# EAGLE board Blinker (EAGLE 6.2)
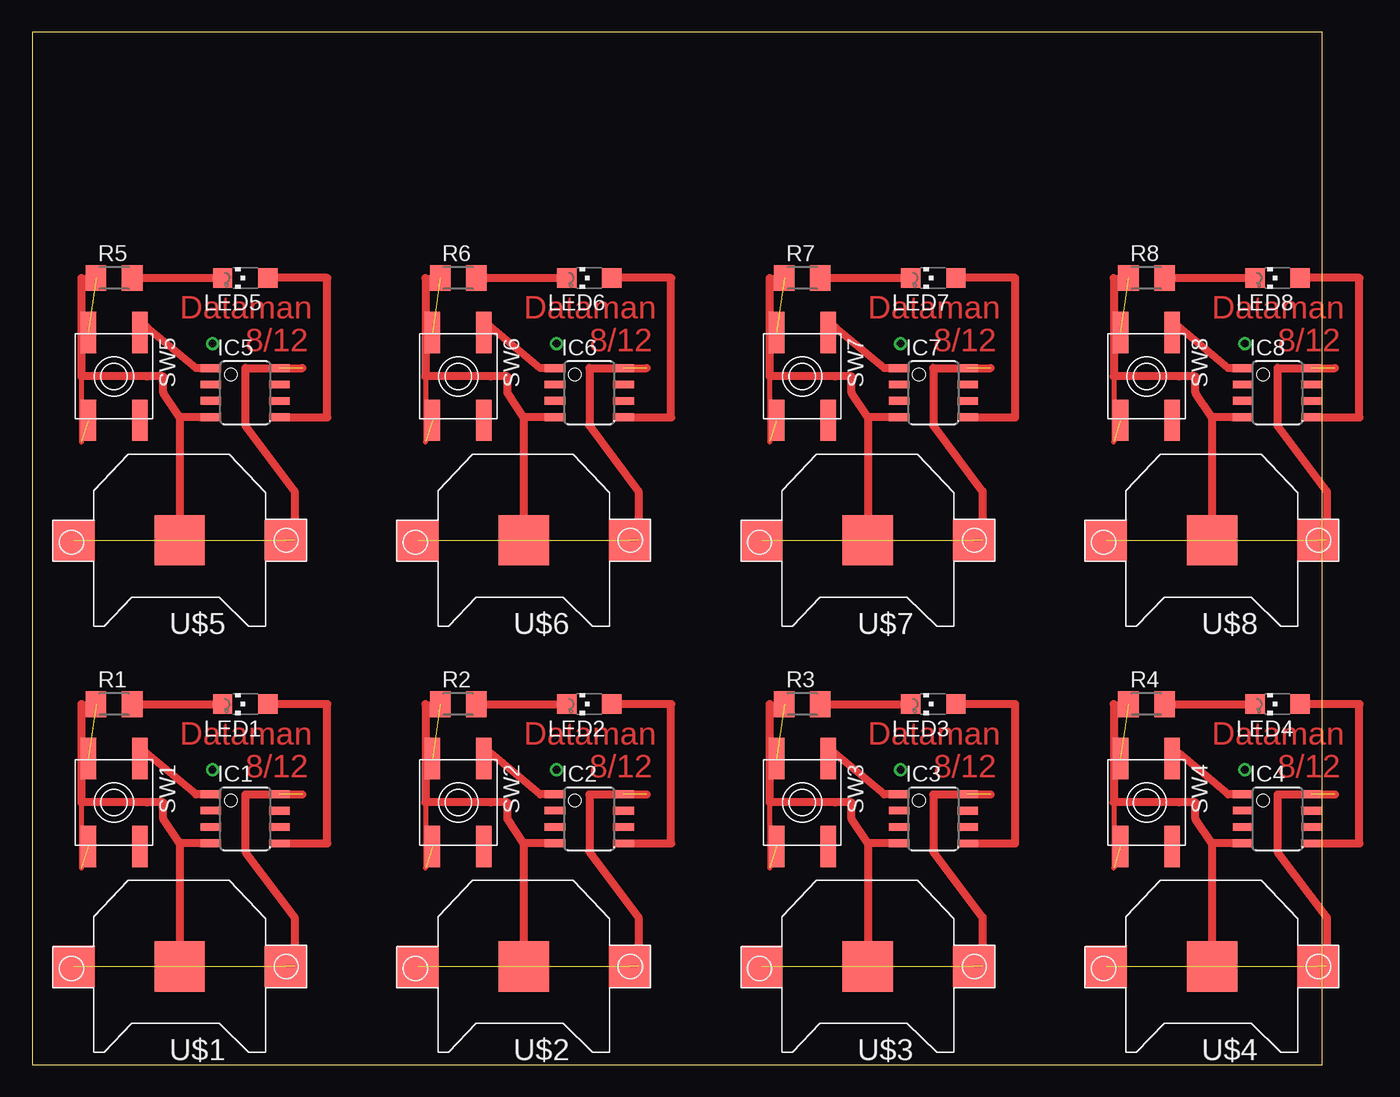
[diagram p0: board, top side]

Size 100 x 80 mm. Coordinates in mm from the lower left corner, seen from the top.
Outline: 0,0 100,0 100,80 0,80 0,0
Copper layers (1*16): Top 0.035mm / dielectric 1.5mm / Bottom 0.035mm
Design rules: minimum track width 10mil, minimum drill 24mil, track to track 8mil, track to pad 8mil, pad to pad 8mil, via to via 8mil, smd to smd 8mil, copper to edge 40mil, drill to drill 8mil, minimum pad ring 10mil, minimum via ring 8mil, stop-mask expansion 4mil, vias tented up to drill 0mil, thermal gap 10mil

## Footprints (pad centres in the part's own frame; a part is rotated, then mirrored left to right if it is on the bottom)
8S1 = smd 0.6 x 1.6: 1 -1.905,-2.654; 2 -0.645,-2.654; 3 0.625,-2.654; 4 1.895,-2.654; 5 1.905,2.654; 6 0.635,2.654; 7 -0.635,2.654; 8 -1.905,2.654
CHIPLED_1206 = smd 1.5 x 1.5: A 0,-1.75; C 0,1.75
M1206 = smd 1.6 x 2: 1 -1.4,0; 2 1.4,0
EVQ-Q2 = smd 3.2 x 1.2: A -3.4,-2; A' 3.4,-2; B -3.4,2; B' 3.4,2
CR1220-SMD = smd 3.2 x 3.2: +$1 -8.2,0; +$2 8.2,0 | smd 3.9 x 3.9: - 0,0

## Placement (x,y rotation side)
IC1  TINY13V-10SSU  [8S1]  16.51,19.05 270 top
IC2  TINY13V-10SSU  [8S1]  43.18,19.05 270 top
IC3  TINY13V-10SSU  [8S1]  69.85,19.05 270 top
IC4  TINY13V-10SSU  [8S1]  96.52,19.05 270 top
IC5  TINY13V-10SSU  [8S1]  16.51,52.07 270 top
IC6  TINY13V-10SSU  [8S1]  43.18,52.07 270 top
IC7  TINY13V-10SSU  [8S1]  69.85,52.07 270 top
IC8  TINY13V-10SSU  [8S1]  96.52,52.07 270 top
LED1  [CHIPLED_1206]  16.51,27.94 90 top
LED2  [CHIPLED_1206]  43.18,27.94 90 top
LED3  [CHIPLED_1206]  69.85,27.94 90 top
LED4  [CHIPLED_1206]  96.52,27.94 90 top
LED5  [CHIPLED_1206]  16.51,60.96 90 top
LED6  [CHIPLED_1206]  43.18,60.96 90 top
LED7  [CHIPLED_1206]  69.85,60.96 90 top
LED8  [CHIPLED_1206]  96.52,60.96 90 top
R1  [M1206]  6.35,27.94 0 top
R2  [M1206]  33.02,27.94 0 top
R3  [M1206]  59.69,27.94 0 top
R4  [M1206]  86.36,27.94 0 top
R5  [M1206]  6.35,60.96 0 top
R6  [M1206]  33.02,60.96 0 top
R7  [M1206]  59.69,60.96 0 top
R8  [M1206]  86.36,60.96 0 top
SW1  SPST_TACT-EVQQ2  [EVQ-Q2]  6.35,20.32 270 top
SW2  SPST_TACT-EVQQ2  [EVQ-Q2]  33.02,20.32 270 top
SW3  SPST_TACT-EVQQ2  [EVQ-Q2]  59.69,20.32 270 top
SW4  SPST_TACT-EVQQ2  [EVQ-Q2]  86.36,20.32 270 top
SW5  SPST_TACT-EVQQ2  [EVQ-Q2]  6.35,53.34 270 top
SW6  SPST_TACT-EVQQ2  [EVQ-Q2]  33.02,53.34 270 top
SW7  SPST_TACT-EVQQ2  [EVQ-Q2]  59.69,53.34 270 top
SW8  SPST_TACT-EVQQ2  [EVQ-Q2]  86.36,53.34 270 top
U$1  [CR1220-SMD]  11.43,7.62 180 top
U$2  [CR1220-SMD]  38.1,7.62 180 top
U$3  [CR1220-SMD]  64.77,7.62 180 top
U$4  [CR1220-SMD]  91.44,7.62 180 top
U$5  [CR1220-SMD]  11.43,40.64 180 top
U$6  [CR1220-SMD]  38.1,40.64 180 top
U$7  [CR1220-SMD]  64.77,40.64 180 top
U$8  [CR1220-SMD]  91.44,40.64 180 top

## Library data of the parts
IC1-IC8 = atmel; MPN: ATTINY13V-10SSU; OC_FARNELL: 1455135; OC_NEWARK: 58M3773
LED1-LED8 R1-R8 SW1-SW8 U$1-U$8 = adafruit

## Nets
N$1: IC1.4 R1.1 SW1.A SW1.A' U$1.-
N$2: IC1.8 U$1.+$1 U$1.+$2
N$3: IC1.1 SW1.B
N$5: LED1.C R1.2
N$6: IC1.5 LED1.A
N$7: IC2.4 R2.1 SW2.A SW2.A' U$2.-
N$8: IC2.8 U$2.+$1 U$2.+$2
N$9: IC2.1 SW2.B
N$10: LED2.C R2.2
N$11: IC2.5 LED2.A
N$13: IC3.4 R3.1 SW3.A SW3.A' U$3.-
N$14: IC3.8 U$3.+$1 U$3.+$2
N$15: IC3.1 SW3.B
N$16: LED3.C R3.2
N$17: IC3.5 LED3.A
N$19: IC4.4 R4.1 SW4.A SW4.A' U$4.-
N$20: IC4.8 U$4.+$1 U$4.+$2
N$21: IC4.1 SW4.B
N$22: LED4.C R4.2
N$23: IC4.5 LED4.A
N$25: IC5.4 R5.1 SW5.A SW5.A' U$5.-
N$26: IC5.8 U$5.+$1 U$5.+$2
N$27: IC5.1 SW5.B
N$28: LED5.C R5.2
N$29: IC5.5 LED5.A
N$31: IC6.4 R6.1 SW6.A SW6.A' U$6.-
N$32: IC6.8 U$6.+$1 U$6.+$2
N$33: IC6.1 SW6.B
N$34: LED6.C R6.2
N$35: IC6.5 LED6.A
N$37: IC7.4 R7.1 SW7.A SW7.A' U$7.-
N$38: IC7.8 U$7.+$1 U$7.+$2
N$39: IC7.1 SW7.B
N$40: LED7.C R7.2
N$41: IC7.5 LED7.A
N$43: IC8.4 R8.1 SW8.A SW8.A' U$8.-
N$44: IC8.8 U$8.+$1 U$8.+$2
N$45: IC8.1 SW8.B
N$46: LED8.C R8.2
N$47: IC8.5 LED8.A

## Tracks (layer width: path | path; a pad name or v marks a point on that pad's centre or on a via)
N$1  (2 unrouted)
  Top 0.406: R1.1 3.81,27.94 | 3.81,20.32 3.81,15.24
  Top 0.61: 3.81,27.94 3.81,20.32 8.89,20.32 10.16,20.32 10.16,19.05 11.43,17.16 | IC1.4 11.43,17.16 | 11.43,17.16 U$1.-
N$2  (3 unrouted)
  Top 0.61: 20.32,7.62 20.32,11.43 16.51,16.51 16.51,20.95 20.95,20.95
N$3
  Top 0.61: IC1.1 12.7,20.95 8.89,24.13 SW1.B
N$4  (via drill 0.6)
  other vias: 13.97,22.86
N$5
  Top 0.61: R1.2 LED1.C
N$6
  Top 0.61: IC1.5 22.86,17.14 22.86,27.94 LED1.A
N$7  (2 unrouted)
  Top 0.406: R2.1 30.48,27.94 | 30.48,20.32 30.48,15.24
  Top 0.61: 30.48,27.94 30.48,20.32 35.56,20.32 36.83,20.32 36.83,19.05 38.1,17.16 | IC2.4 38.1,17.16 | 38.1,17.16 U$2.-
N$8  (3 unrouted)
  Top 0.61: 46.99,7.62 46.99,11.43 43.18,16.51 43.18,20.95 47.62,20.95
N$9
  Top 0.61: IC2.1 39.37,20.95 35.56,24.13 SW2.B
N$10
  Top 0.61: R2.2 LED2.C
N$11
  Top 0.61: IC2.5 49.53,17.14 49.53,27.94 LED2.A
N$12  (via drill 0.6)
  other vias: 40.64,22.86
N$13  (2 unrouted)
  Top 0.406: R3.1 57.15,27.94 | 57.15,20.32 57.15,15.24
  Top 0.61: 57.15,27.94 57.15,20.32 62.23,20.32 63.5,20.32 63.5,19.05 64.77,17.16 | IC3.4 64.77,17.16 | 64.77,17.16 U$3.-
N$14  (3 unrouted)
  Top 0.61: 73.66,7.62 73.66,11.43 69.85,16.51 69.85,20.95 74.3,20.95
N$15
  Top 0.61: IC3.1 66.04,20.95 62.23,24.13 SW3.B
N$16
  Top 0.61: R3.2 LED3.C
N$17
  Top 0.61: IC3.5 76.2,17.14 76.2,27.94 LED3.A
N$18  (via drill 0.6)
  other vias: 67.31,22.86
N$19  (2 unrouted)
  Top 0.406: R4.1 83.82,27.94 | 83.82,20.32 83.82,15.24
  Top 0.61: 83.82,27.94 83.82,20.32 88.9,20.32 90.17,20.32 90.17,19.05 91.44,17.16 | IC4.4 91.44,17.16 | 91.44,17.16 U$4.-
N$20  (3 unrouted)
  Top 0.61: 100.33,7.62 100.33,11.43 96.52,16.51 96.52,20.95 100.97,20.95
N$21
  Top 0.61: IC4.1 92.71,20.95 88.9,24.13 SW4.B
N$22
  Top 0.61: R4.2 LED4.C
N$23
  Top 0.61: IC4.5 102.87,17.14 102.87,27.94 LED4.A
N$24  (via drill 0.6)
  other vias: 93.98,22.86
N$25  (2 unrouted)
  Top 0.406: R5.1 3.81,60.96 | 3.81,53.34 3.81,48.26
  Top 0.61: 3.81,60.96 3.81,53.34 8.89,53.34 10.16,53.34 10.16,52.07 11.43,50.17 | IC5.4 11.43,50.17 | 11.43,50.17 U$5.-
N$26  (3 unrouted)
  Top 0.61: 20.32,40.64 20.32,44.45 16.51,49.53 16.51,53.98 20.95,53.98
N$27
  Top 0.61: IC5.1 12.7,53.98 8.89,57.15 SW5.B
N$28
  Top 0.61: R5.2 LED5.C
N$29
  Top 0.61: IC5.5 22.86,50.16 22.86,60.96 LED5.A
N$30  (via drill 0.6)
  other vias: 13.97,55.88
N$31  (2 unrouted)
  Top 0.406: R6.1 30.48,60.96 | 30.48,53.34 30.48,48.26
  Top 0.61: 30.48,60.96 30.48,53.34 35.56,53.34 36.83,53.34 36.83,52.07 38.1,50.17 | IC6.4 38.1,50.17 | 38.1,50.17 U$6.-
N$32  (3 unrouted)
  Top 0.61: 46.99,40.64 46.99,44.45 43.18,49.53 43.18,53.98 47.62,53.98
N$33
  Top 0.61: IC6.1 39.37,53.98 35.56,57.15 SW6.B
N$34
  Top 0.61: R6.2 LED6.C
N$35
  Top 0.61: IC6.5 49.53,50.16 49.53,60.96 LED6.A
N$36  (via drill 0.6)
  other vias: 40.64,55.88
N$37  (2 unrouted)
  Top 0.406: R7.1 57.15,60.96 | 57.15,53.34 57.15,48.26
  Top 0.61: 57.15,60.96 57.15,53.34 62.23,53.34 63.5,53.34 63.5,52.07 64.77,50.17 | IC7.4 64.77,50.17 | 64.77,50.17 U$7.-
N$38  (3 unrouted)
  Top 0.61: 73.66,40.64 73.66,44.45 69.85,49.53 69.85,53.98 74.3,53.98
N$39
  Top 0.61: IC7.1 66.04,53.98 62.23,57.15 SW7.B
N$40
  Top 0.61: R7.2 LED7.C
N$41
  Top 0.61: IC7.5 76.2,50.16 76.2,60.96 LED7.A
N$42  (via drill 0.6)
  other vias: 67.31,55.88
N$43  (2 unrouted)
  Top 0.406: R8.1 83.82,60.96 | 83.82,53.34 83.82,48.26
  Top 0.61: 83.82,60.96 83.82,53.34 88.9,53.34 90.17,53.34 90.17,52.07 91.44,50.17 | IC8.4 91.44,50.17 | 91.44,50.17 U$8.-
N$44  (3 unrouted)
  Top 0.61: 100.33,40.64 100.33,44.45 96.52,49.53 96.52,53.98 100.97,53.98
N$45
  Top 0.61: IC8.1 92.71,53.98 88.9,57.15 SW8.B
N$46
  Top 0.61: R8.2 LED8.C
N$47
  Top 0.61: IC8.5 102.87,50.16 102.87,60.96 LED8.A
N$48  (via drill 0.6)
  other vias: 93.98,55.88

## Text on the board
Top: Dataman | Dataman | Dataman | Dataman | 8/12 | 8/12 | 8/12 | 8/12 | Dataman | Dataman | Dataman | Dataman | 8/12 | 8/12 | 8/12 | 8/12